# Altium PCB CAN-to-CAN.PcbDoc
Units mil, origin at the board's own origin, x right, y up, seen from the top; angles counter-clockwise.
Board outline 6000 x 4000 mil, 2 copper layers (Top Layer, Bottom Layer); 112 components, 87 nets, 444 pads, 10 vias.
Unrouted connection lines stored in the file: 229.
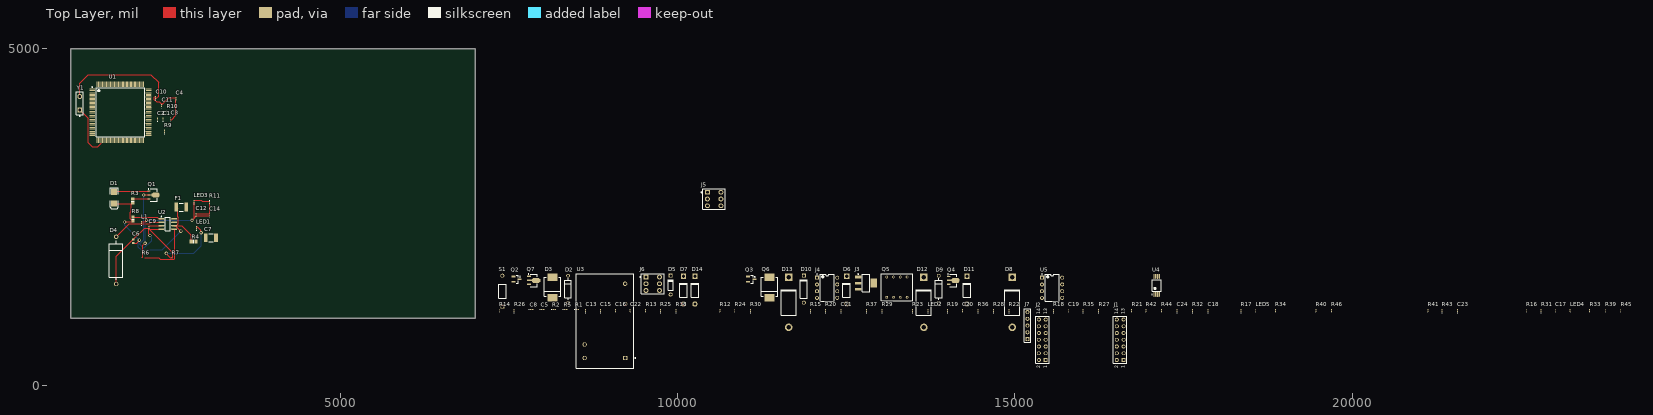
[diagram p0: Top Layer view]
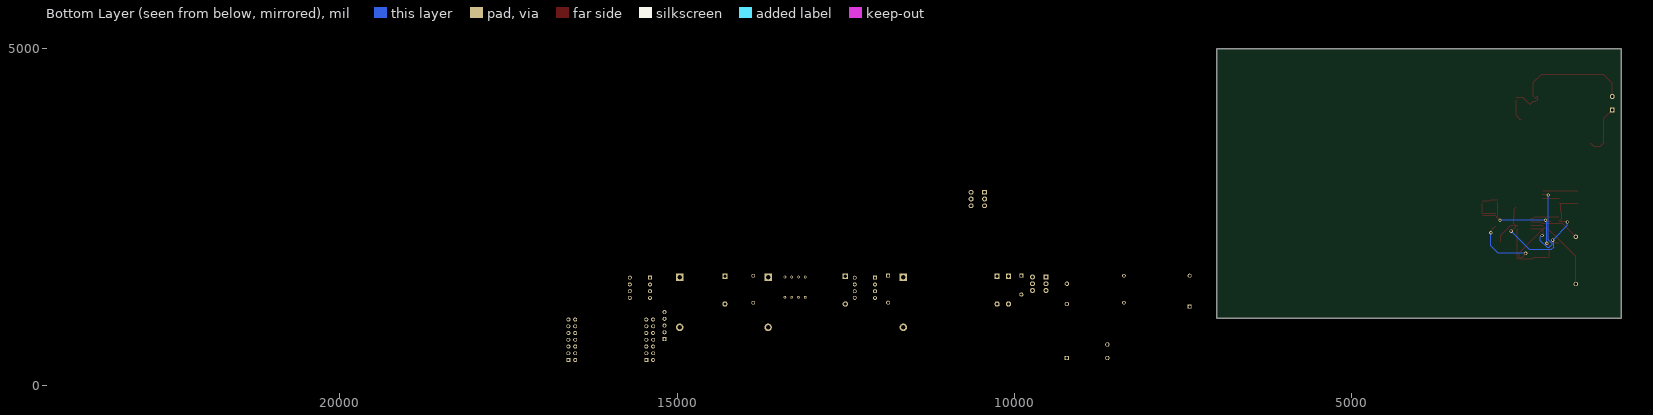
[diagram p1: Bottom Layer view, seen from below]

## Layer stack, top to bottom
Top Solder: solder mask 0.4, Solder Resist, Dk 3.5
Top Layer: signal copper 1.4
Dielectric 1: dielectric 12.6, FR-4, Dk 4.8
Bottom Layer: signal copper 1.4
Bottom Solder: solder mask 0.4, Solder Resist, Dk 3.5

## Board outline
1000,1000 7000,1000 7000,5000 1000,5000

## Design rules (kind name [scope] priority, off if disabled: settings)
Clearance [All] p1: gap=10 ignorepadtopadclearanceinfootprint=FALSE except(0: Arc-Hole Track-Hole SMDPad-Hole THPad-Hole Via-Hole Fill-Hole Poly-Hole Region-Hole Text-Hole)
PolygonConnect [All] p1: connectstyle=Relief reliefconductorwidth=10 reliefentries=4 polygonreliefangle="90 Angle" airgapwidth=10
RoomDefinition CAN-to-CAN [InComponentClass('CAN-to-CAN')] p1: confinementstyle=ConfineIn formatcopy=TRUE lockcomponents=FALSE outline 7335,248.78 24155,248.78 24155,1253.78 7335,1253.78
RoutingVias [All] p1: holewidth=28 width=50 viastyle="Through Hole" minholewidth=28 minwidth=50 maxholewidth=28 maxwidth=50
SolderMaskExpansion [All] p1: expansion=4
Width [All] p1: maxlimit=10 minlimit=10 preferedwidth=10
30 further rules are at their usual default settings.

## Components (designator, comment, footprint, x,y, rotation, side; value= is the part's Value field where it differs from the comment)
C1 "100n" 0603 2370,3955 r90 top
C2 "100n" 0603 2290,3955 r90 top
C3 "100n" 0603 2485,3960 r90 top
C4 "100n" 0603 2560,4256.22 r90 top
C5 "100n" 0603 8000,1133.78 r0 top
C6 "10u/16" 1608[0603] 1930,2145 r90 top value=470u/16
C7 "100n" 1812 3080,2195 r0 top
C8 "10n" 0603 7835,1133.78 r0 top value=100pF
C9 "100p" 0603 2160,2350 r90 top value=100pF
C10 "27p" 0603 2260,4273.78 r90 top value=100n
C11 "27p" 0603 2350,4155 r90 top value=100n
C12 "100u/6V3" 0402 2860,2535 r90 top value=470u/16
C13 "100n" 0603 8635,1118.78 r90 top
C14 "100n" 0603 3055,2535 r90 top
C15 "100n" 0603 8855,1118.78 r90 top
C16 "100n" 0603 9075,1118.78 r90 top
C17 "100n" 0603 23010,1118.78 r90 top
C18 "100n" 0603 17860,1118.78 r90 top
C19 "100n" 0603 15790,1118.78 r90 top
C20 "100n" 0603 14220,1118.78 r90 top
C21 "100n" 0603 12420,1118.78 r90 top
C22 "100n" 0603 9295,1118.78 r90 top
C23 "4n7" 0603 21560,1118.78 r90 top value=100n
C24 "4n7" 0603 17400,1118.78 r90 top value=100n
D1 "P6SMB15A" SMB 1645,2790 r270 top
D2 "LL4148" DIODE-0.4 8375,1433.78 r90 top
D3 "LL4448" DIODE_SMC 8145,1458.78 r90 top
D4 "LL5817" DIODE-0.7 1675,1860 r90 top
D5 "BAT54S" DO-35 9895,1493.78 r90 top
D6 "BAT54S" DO-41 12505,1418.78 r90 top
D7 "BAT54S" DO-204AL 10085,1418.78 r90 top
D8 "LL4148" DO-201AD 14960,1238.78 r90 top
D9 "LL4148" DIODE-0.4 13870,1433.78 r90 top
D10 "LL4148" DO-7 11870,1433.78 r90 top
D11 "BAT54S" DO-41 14290,1418.78 r90 top
D12 "BAT54S" DO-201AD 13650,1238.78 r90 top
D13 "BAT54S" DO-201AD 11645,1238.78 r90 top
D14 "BAT54S" DO-41 10255,1418.78 r90 top
F1 "Fuse 1" 1812 2640,2650 r180 top
J1 "Header 7X2" HDR2X7 16610,383.78 r90 top
J2 "Header 7X2" HDR2X7 15455,383.78 r90 top
J3 "MX-43045-0400" SOT223_N 12790,1523.78 r0 top
J4 "MX-43045-0800" DIP-8 12215,1453.78 r0 top
J5 "MX-43045-0600" DPDT-6 10540,2770.2 r0 top
J6 "MX-43045-0600" DPDT-6 9630,1513.78 r0 top
J7 "ZL201" HDR1X5 15185,693.78 r90 top
L1 "DL22-330" 0603 2050,2420 r90 top value=100uH
LED1 "HCL-1904AYL" 0603 2865,2345 r90 top
LED2 "HCL-1906BR1" 0603 13710,1118.78 r90 top
LED3 "HCL-1903BG4" 0603 2830,2735 r90 top
LED4 "HCL-1904AYL" 0603 23230,1118.78 r90 top
LED5 "HCL-1906BR1" 0603 18570,1118.78 r90 top
Q1 "BSS138" SOT89L 2230,2830 r0 top
Q2 "BSS123" SOT23_M 7610,1583.78 r0 top
Q3 "BSS123" SOT23_M 11090,1583.78 r0 top
Q4 "BSS123" SOT89L 14085,1563.78 r0 top
Q5 "BSS123" DIP-P8 13250,1463.78 r0 top
Q6 "BSS123" DIODE_SMC 11360,1458.78 r90 top
Q7 "BSS123" SOT89N 7865,1563.78 r0 top
R1 "4k7" 0603 8510,1133.78 r0 top value=1K
R2 "4k7" 0603 8170,1133.78 r0 top value=1K
R3 "1M" 6-0805_L 1920,2740 r90 top value=1K
R4 "4k7" 6-0805_N 2825,2140 r0 top value=1K
R5 "10k" 0603 8340,1133.78 r0 top value=1K
R6 "3k6 1%" 0603 2085,1900 r0 top value=1K
R7 "1k2 1%" 0603 2530,1900 r0 top value=1K
R8 "1R" 6-0805_L 1925,2471.5 r270 top value=1K
R9 "nc" 0603 2390,3775 r90 top value=1K
R10 "1k8" 0603 2425,4060 r90 top value=1K
R11 "1k8" 0603 3060,2720 r270 top value=1K
R12 "10k" 0603 10625,1118.78 r90 top value=1K
R13 "470" 0603 9525,1118.78 r90 top value=1K
R14 "4k7" 0603 7355,1118.78 r90 top value=1K
R15 "4k7" 0603 11970,1118.78 r90 top value=1K
R16 "4k7" 0603 22580,1118.78 r90 top value=1K
R17 "4k7" 0603 18350,1118.78 r90 top value=1K
R18 "4k7" 0603 15570,1118.78 r90 top value=1K
R19 "4k7" 0603 14000,1118.78 r90 top value=1K
R20 "4k7" 0603 12190,1118.78 r90 top value=1K
R21 "10k" 0603 16730,1118.78 r90 top value=1K
R22 "10k" 0603 14910,1118.78 r90 top value=1K
R23 "10k" 0603 13480,1118.78 r90 top value=1K
R24 "10k" 0603 10845,1118.78 r90 top value=1K
R25 "1k" 0603 9745,1118.78 r90 top value=1K
R26 "4k7" 0603 7575,1118.78 r90 top value=1K
R27 "10k" 0603 16240,1118.78 r90 top value=1K
R28 "10k" 0603 14680,1118.78 r90 top value=1K
R29 "10k" 0603 13030,1118.78 r90 top value=1K
R30 "10k" 0603 11080,1118.78 r90 top value=1K
R31 "1k" 0603 22800,1118.78 r90 top value=1K
R32 "1k" 0603 17630,1118.78 r90 top value=1K
R33 "nc" 0603 23520,1118.78 r90 top value=1K
R34 "nc" 0603 18860,1118.78 r90 top value=1K
R35 "1k" 0603 16010,1118.78 r90 top value=1K
R36 "1k" 0603 14450,1118.78 r90 top value=1K
R37 "1k" 0603 12800,1118.78 r90 top value=1K
R38 "1k" 0603 9975,1118.78 r90 top value=1K
R39 "CAN0001" 0603 23750,1118.78 r90 top
R40 "CAN0001" 0603 19460,1118.78 r90 top
R41 "68" 0603 21120,1118.78 r90 top value=1K
R42 "68" 0603 16940,1118.78 r90 top value=1K
R43 "68" 0603 21330,1118.78 r90 top value=1K
R44 "68" 0603 17170,1118.78 r90 top value=1K
R45 "CAN0001" 0603 23980,1118.78 r90 top
R46 "CAN0001" 0603 19690,1118.78 r90 top
S1 "DTSM32NB" PIN-W2/E2.8 7400,1403.78 r90 top
U1 "PIC30F5011" TQG144_M 1737.68,4056.1 r0 top
U2 "MC33063AD" SO8_N 2440,2400 r0 top
U3 "MCP1320-46LT" MODULE5B 8920,963.78 r90 top
U4 "MCP2551-I/SN" DB008_L 17100,1488.78 r90 top
U5 "MCP2551-I/SN" DIP-8 15550,1453.78 r0 top
Y1 "10MHz" SPST-2 1135,4190 r90 top

## Footprints (in the part's own frame and the unit in brackets; to place one, negate y for a bottom-side part, rotate by r counter-clockwise, add the part's x,y. Pads: shape width x height; smd on the part's side, far side on the other; paste and mask are expansions set on the pad)
6-0805_L [mm] "Chip Resistor, Body 2.0x1.2mm, IPC High Density"
  rect 1x1.3 smd: 1(-0.8,0) 2(0.8,0)
  silkscreen extent 0,-0.55 0,0.55, body extent -1.07,-0.7 1.07,0.7, height 0.7
6-0805_N [mm] "Chip Resistor, Body 2.0x1.2mm, IPC Medium Density"
  rect 1.2x1.4 smd: 1(-0.9,0) 2(0.9,0)
  silkscreen extent 0,-0.6 0,0.6, body extent -1.07,-0.7 1.07,0.7, height 0.7
0402 [mm] "Chip Capacitor, Body 1.0x0.5mm, IPC High Density"
  rect 0.6x0.5 smd: 1(-0.5,0) 2(0.5,0)
  body extent -0.55,-0.3 0.55,0.3, height 1.3
0603 [mm] "Chip Inductor, Body 0.6x0.3mm, IPC High Density"
  rect 0.5x0.3 smd: 1(-0.35,0) 2(0.35,0)
  silkscreen extent -0.9,-0.05 -0.9,0.05, body extent -0.33,-0.18 0.33,0.18, height 0.55
1608[0603] [mm] "Chip Capacitor, Body 1.6x0.8mm, IPC High Density"
  rect 0.8x0.9 smd: 1(-0.7,0) 2(0.7,0)
  body extent -0.87,-0.48 0.87,0.48, height 1.3
1812 [mm] "Chip Capacitor, Body 4.5x3.2mm, IPC High Density"
  rect 1.4x3.3 smd: 1(-1.9,0) 2(1.9,0)
  silkscreen extent -0.8,-1.55 0.8,1.55, body extent -2.4,-1.7 2.4,1.7, height 1.4
DB008_L [mm] "SOP, 8-Leads, Body 3x5.3mm, Pitch 0.65mm, IPC High Density"
  oval 1.8x0.45 smd: 1(-3.4,0.975) 2(-3.4,0.325) 3(-3.4,-0.325) 4(-3.4,-0.975) 5(3.4,-0.975) 6(3.4,-0.325) 7(3.4,0.325) 8(3.4,0.975)
  silkscreen extent -3.52,-1.65 2.1,1.87, body extent -2.8,-1.65 2.8,1.65, height 2
DIODE-0.4 [mm] "Diode, Thru-Hole; 2 Leads; 0.4 in Pin Spacing"
  round 1.4 hole 0.85: 1(-5.08,0) 2(5.08,0)
  silkscreen extent -4.06,-1.27 4.06,1.27
DIODE-0.7 [mm] "Diode, Thru-Hole; 2 Leads; 0.7 in Pin Spacing"
  round 1.65 hole 1: 1(-8.89,0) 2(8.89,0)
  silkscreen extent -7.37,-2.54 7.37,2.54
DIODE_SMC [mil] "Diode; 2 Leads"
  rect 110x150 smd: 1(-150,0) 2(150,0)
  silkscreen extent -130,-120 150,120
DIP-8 [mm] "DIP; 8 Leads; Row Spacing 7.62 mm; Pitch 2.54 mm"
  rect 1.5x1.5 hole 0.9: 1(-3.81,3.81)
  round 1.5 hole 0.9: 2(-3.81,1.27) 3(-3.81,-1.27) 4(-3.81,-3.81) 5(3.81,-3.81) 6(3.81,-1.27) 7(3.81,1.27) 8(3.81,3.81)
  silkscreen extent -3.93,-5.15 2.65,5.23, body extent -3.6,-5.15 3.6,5.15, height 5.08
DIP-P8 [mm] "Dual-Pole Dual-Throw Relay; 8 Leads"
  rect 1x1 hole 0.6: 1(-3.81,-3.81)
  round 1 hole 0.6: 2(-1.27,-3.81) 3(1.27,-3.81) 4(3.81,-3.81) 5(3.81,3.81) 6(1.27,3.81) 7(-1.27,3.81) 8(-3.81,3.81)
  silkscreen extent -5.9,-5.82 5.9,5.05
DO-7 [mm] "Diode, Axial; Body 7 x 2.7 mm (LxDia. max), Lead Dia. 0.53 mm (max)"
  round 1.5 hole 0.9: 1(-5.1,0)
  rect 1.5x1.5 hole 0.9: 2(5.1,0)
  silkscreen extent -3.5,-1.35 3.6,1.35
DO-35 [mm] "Diode, Axial; Body 3.8 x 1.9 mm (LxDia. max), Lead Dia. 0.53 mm (max)"
  round 1.5 hole 0.9: 1(-3.55,0)
  rect 1.5x1.5 hole 0.9: 2(3.55,0)
  silkscreen extent -1.95,-0.95 2.05,0.95
DO-41 [mm] "Diode, Axial; Body 5.2 x 2.7 mm (LxDia. max), Lead Dia. 0.86 mm (max)"
  round 2 hole 1.2: 1(-5.23,0)
  rect 2x2 hole 1.2: 2(5.23,0)
  silkscreen extent -2.65,-1.4 2.75,1.4
DO-201AD [mm] "Diode, Axial; Body 9.5 x 5.6 mm (LxDia. max), Lead Dia. 1.32 mm (max)"
  round 2.8 hole 1.7: 1(-9.42,0)
  rect 2.8x2.8 hole 1.7: 2(9.42,0)
  silkscreen extent -4.8,-2.8 4.9,2.8
DO-204AL [mm] "Diode, Axial; Body 5.2 x 2.7 mm (LxDia. max), Lead Dia. 0.86 mm (max)"
  round 2 hole 1.2: 1(-5.23,0)
  rect 2x2 hole 1.2: 2(5.23,0)
  silkscreen extent -2.65,-1.4 2.75,1.4
DPDT-6 [mm] "Switch; 6 Leads"
  rect 1.85x1.85 hole 1.1: 1(-2.54,2.54)
  round 1.85 hole 1.1: 2(-2.54,0) 3(-2.54,-2.54) 4(2.54,-2.54) 5(2.54,0) 6(2.54,2.54)
  silkscreen extent -4.96,-3.81 4.28,3.81
HDR1X5 [mm] "Connector; Header; 5 Position"
  rect 1.5x1.5 hole 0.9: 1(0,0)
  round 1.5 hole 0.9: 2(2.54,0) 3(5.08,0) 4(7.62,0) 5(10.16,0)
  silkscreen extent -1.27,-1.27 11.43,1.27
HDR2X7 [mm] "Connector; Header; 7x2 Position"
  rect 1.5x1.5 hole 0.9: 1(0,0)
  round 1.5 hole 0.9: 2(0,2.54) 3(2.54,0) 4(2.54,2.54) 5(5.08,0) 6(5.08,2.54) 7(7.62,0) 8(7.62,2.54) 9(10.16,0) 10(10.16,2.54) 11(12.7,0) 12(12.7,2.54) 13(15.24,0) 14(15.24,2.54)
  silkscreen extent -1.27,-1.27 16.51,3.81
MODULE5B [mm] "DIP; 5 Round Pins; Row Space 15.24 mm; Pitch 2.54 mm"
  rect 1.65x1.65 hole 1: 1(-13.97,-7.62)
  round 1.65 hole 1: 2(-13.97,7.62) 3(-8.89,7.62) 4(13.97,-7.62) 5(6.35,-7.62)
  silkscreen extent -17.8,-11.58 17.8,10.8, body extent -17.8,-10.8 17.8,10.8, height 14
PIN-W2/E2.8 [mm] "Thru-Hole; 2 Leads"
  rect 1.5x1.5 hole 0.9: 1(-5.825,0)
  round 1.5 hole 0.9: 2(5.825,0)
  silkscreen extent -2.65,-1.4 2.65,1.4
SMB [mm] "DO-214-AA/SMB; 2 C-Bend Leads; Body 5.3 x 3.6 mm, inc. leads (LxW)"
  rect 2.3x2.3 smd: 1(-2.25,0) 2(2.25,0)
  silkscreen extent -3.8,-1.55 4.1,1.55
SO8_N [mm] "SOIC, 8-Leads, Body 4.9x3.9mm, Pitch 1.27mm, IPC Medium Density"
  oval 2.2x0.6 smd: 1(-2.4,1.905) 2(-2.4,0.635) 3(-2.4,-0.635) 4(-2.4,-1.905) 5(2.4,-1.905) 6(2.4,-0.635) 7(2.4,0.635) 8(2.4,1.905)
  silkscreen extent -2.52,-2.5 0.9,2.88, body extent -2,-2.5 2,2.5, height 1.75
SOT23_M [mm] "SOT23, 3-Leads, Body 2.9x1.3mm, Pitch 0.95mm, Lead Span 2.3mm - Reverse Pinning, IPC Low Density"
  rect 1.45x0.6 smd: 1(1.175,0) 2(-1.175,-0.95) 3(-1.175,0.95)
  silkscreen extent -0.1,-1.5 1.48,1.5, body extent -0.7,-1.5 0.7,1.5, height 1.1
SOT89L [mm] "SOT89, 3-Leads, Body 4.5x2.4 mm, Pitch 1.5mm, Lead Span 4.1mm, IPC High Density"
  rect 1.2x0.5 smd: 1(-1.7,1.5) 3(-1.7,-1.5)
  rect 1.6x0.5 smd: 2(-1.5,0)
  oct 3x1.8 smd: 2(0.8,0)
  silkscreen extent -2.07,-2.3 1.3,2.42, body extent -1.3,-2.3 1.3,2.3, height 1.6
SOT89N [mm] "SOT89, 3-Leads, Body 4.5x2.4 mm, Pitch 1.5mm, Lead Span 4.1mm, IPC Medium Density"
  rect 1.4x0.6 smd: 1(-1.8,1.5) 3(-1.8,-1.5)
  rect 1.8x0.6 smd: 2(-1.6,0)
  oct 3.2x1.9 smd: 2(0.9,0)
  silkscreen extent -2.07,-2.3 1.3,2.47, body extent -1.3,-2.3 1.3,2.3, height 1.6
SOT223_N [mm] "SOT223, 4-Leads, Body 6.5x3.5mm, Pitch 2.3mm, Lead Span 7mm, IPC Medium Density"
  rect 2.4x1 smd: 1(-2.9,2.3) 2(-2.9,0) 3(-2.9,-2.3)
  rect 2.4x3.3 smd: 4(2.9,0)
  silkscreen extent -3.02,-3.35 1.4,3.47, body extent -1.85,-3.35 1.85,3.35, height 1.7
SPST-2 [mm] "Switch; 2 Leads"
  rect 1.85x1.85 hole 1.1: 1(-2.54,0)
  round 1.85 hole 1.1: 2(2.54,0)
  silkscreen extent -4.89,-1.27 4.28,1.27
TQG144_M [mm] "Thin QFP, 144-Leads, Body 20x20mm, Pitch 0.5mm, IPC Low Density"
  oval 2.1x0.3 smd: 1(-10.6,8.75) 2(-10.6,8.25) 3(-10.6,7.75) 4(-10.6,7.25) 5(-10.6,6.75) 6(-10.6,6.25) 7(-10.6,5.75) 8(-10.6,5.25) 9(-10.6,4.75) 10(-10.6,4.25) 11(-10.6,3.75) 12(-10.6,3.25) 13(-10.6,2.75) 14(-10.6,2.25) 15(-10.6,1.75) 16(-10.6,1.25) 17(-10.6,0.75) 18(-10.6,0.25) 19(-10.6,-0.25) 20(-10.6,-0.75) 21(-10.6,-1.25) 22(-10.6,-1.75) 23(-10.6,-2.25) 24(-10.6,-2.75) 25(-10.6,-3.25) 26(-10.6,-3.75) 27(-10.6,-4.25) 28(-10.6,-4.75) 29(-10.6,-5.25) 30(-10.6,-5.75) 31(-10.6,-6.25) 32(-10.6,-6.75) 33(-10.6,-7.25) 34(-10.6,-7.75) 35(-10.6,-8.25) 36(-10.6,-8.75) 73(10.6,-8.75) 74(10.6,-8.25) 75(10.6,-7.75) 76(10.6,-7.25) 77(10.6,-6.75) 78(10.6,-6.25) 79(10.6,-5.75) 80(10.6,-5.25) 81(10.6,-4.75) 82(10.6,-4.25) 83(10.6,-3.75) 84(10.6,-3.25) 85(10.6,-2.75) 86(10.6,-2.25) 87(10.6,-1.75) 88(10.6,-1.25) 89(10.6,-0.75) 90(10.6,-0.25) 91(10.6,0.25) 92(10.6,0.75) 93(10.6,1.25) 94(10.6,1.75) 95(10.6,2.25) 96(10.6,2.75) 97(10.6,3.25) 98(10.6,3.75) 99(10.6,4.25) 100(10.6,4.75) 101(10.6,5.25) 102(10.6,5.75) 103(10.6,6.25) 104(10.6,6.75) 105(10.6,7.25) 106(10.6,7.75) 107(10.6,8.25) 108(10.6,8.75)
  oval 0.3x2.1 smd: 37(-8.75,-10.6) 38(-8.25,-10.6) 39(-7.75,-10.6) 40(-7.25,-10.6) 41(-6.75,-10.6) 42(-6.25,-10.6) 43(-5.75,-10.6) 44(-5.25,-10.6) 45(-4.75,-10.6) 46(-4.25,-10.6) 47(-3.75,-10.6) 48(-3.25,-10.6) 49(-2.75,-10.6) 50(-2.25,-10.6) 51(-1.75,-10.6) 52(-1.25,-10.6) 53(-0.75,-10.6) 54(-0.25,-10.6) 55(0.25,-10.6) 56(0.75,-10.6) 57(1.25,-10.6) 58(1.75,-10.6) 59(2.25,-10.6) 60(2.75,-10.6) 61(3.25,-10.6) 62(3.75,-10.6) 63(4.25,-10.6) 64(4.75,-10.6) 65(5.25,-10.6) 66(5.75,-10.6) 67(6.25,-10.6) 68(6.75,-10.6) 69(7.25,-10.6) 70(7.75,-10.6) 71(8.25,-10.6) 72(8.75,-10.6) 109(8.75,10.6) 110(8.25,10.6) 111(7.75,10.6) 112(7.25,10.6) 113(6.75,10.6) 114(6.25,10.6) 115(5.75,10.6) 116(5.25,10.6) 117(4.75,10.6) 118(4.25,10.6) 119(3.75,10.6) 120(3.25,10.6) 121(2.75,10.6) 122(2.25,10.6) 123(1.75,10.6) 124(1.25,10.6) 125(0.75,10.6) 126(0.25,10.6) 127(-0.25,10.6) 128(-0.75,10.6) 129(-1.25,10.6) 130(-1.75,10.6) 131(-2.25,10.6) 132(-2.75,10.6) 133(-3.25,10.6) 134(-3.75,10.6) 135(-4.25,10.6) 136(-4.75,10.6) 137(-5.25,10.6) 138(-5.75,10.6) 139(-6.25,10.6) 140(-6.75,10.6) 141(-7.25,10.6) 142(-7.75,10.6) 143(-8.25,10.6) 144(-8.75,10.6)
  silkscreen extent -10.72,-9.15 9.15,9.57, body extent -10,-10 10,10, height 1.6

## Part data
C1 C2 C3 C4 C5 C7 C8 C9 C10 C11 C13 C14 C15 C16 C17 C18 C19 C20 C21 C22 C23 C24: library part Cap, "Capacitor", LatestRevisionDate=17-Jul-2002, LatestRevisionNote="Re-released for DXP Platform.", PackageReference=RAD-0.3, Published=8-Jun-2000, Publisher="Altium Limited"
C6 C12: library part "Cap Pol1", "Polarized Capacitor (Radial)", LatestRevisionDate=17-Jul-2002, LatestRevisionNote="Re-released for DXP Platform.", PackageReference=RB7.6-15, Published=8-Jun-2000, Publisher="Altium Limited"
D1: library part "D Zener", "Zener Diode", LatestRevisionDate=17-Jul-2002, LatestRevisionNote="Re-released for DXP Platform.", PackageReference=DIODE-0.7, Published=8-Jun-2000, Publisher="Altium Limited"
D2 D4 D8 D9 D10: library part 1N4148, "High Conductance Fast Diode", Code_JEDEC=DO-204-AH, ComponentLink1Description="Manufacturer Link", ComponentLink1URL=http://www.fairchildsemi.com/, ComponentLink2Description=Datasheet, ComponentLink2URL=http://www.fairchildsemi.com/ds/1N%2F1N4148.pdf, DatasheetDocument=1997, LatestRevisionDate=17-Jul-2002, LatestRevisionNote="Re-released for DXP Platform.", PackageReference=DO-35, Published=8-Jun-2000, Publisher="Altium Limited"
D3: library part Diode, "Default Diode", PackageDocument=Sep-1996, Code_JEDEC=DO-214-AB, LatestRevisionDate=17-Jul-2002, LatestRevisionNote="Re-released for DXP Platform.", PackageReference=SMC, Published=8-Jun-2000, Publisher="Altium Limited"
D5 D6 D7 D11 D12 D13 D14: "Schottky Barrier Double Diode", ComponentLink1Description="Manufacturer Link", ComponentLink1URL=http://www.semiconductors.philips.com/, ComponentLink2Description=Datasheet, ComponentLink2URL=http://www.semiconductors.philips.com/acrobat/datasheets/BAT54_SERIES_4.pdf, DatasheetVersion=4-Mar-2002, LatestRevisionDate=12-Dec-2006, LatestRevisionNote="IPC-7351 Footprint Added.", PackageDescription="3-Pin SOT-23 Package 0.95 mm Pitch, 2.3 mm Lead Span", PackageReference=SOT23, PackageVersion=May-1999, Published=17-Sep-2003, Publisher="Altium Limited"
F1: "Fuse", LatestRevisionDate=17-Jul-2002, LatestRevisionNote="Re-released for DXP Platform.", PackageReference=PIN-W2/E2.8, Published=8-Jun-2000, Publisher="Altium Limited"
J1 J2: "Header, 7-Pin, Dual row", LatestRevisionDate=17-Jul-2002, LatestRevisionNote="Re-released for DXP Platform.", Publisher="Altium Limited"
J3: library part "Header 2X2", "Header, 2-Pin, Dual row", LatestRevisionDate=17-Jul-2002, LatestRevisionNote="Re-released for DXP Platform.", Publisher="Altium Limited"
J4: library part "Header 4X2A", "Header, 4-Pin, Dual row", LatestRevisionDate=17-Jul-2002, LatestRevisionNote="Re-released for DXP Platform.", Publisher="Altium Limited"
J5 J6: library part "Header 6", "Header, 6-Pin", LatestRevisionDate=17-Jul-2002, LatestRevisionNote="Re-released for DXP Platform.", Publisher="Altium Limited"
J7: library part CON5, "Connector"
L1: library part "Inductor Iron", "Magnetic-Core Inductor", Published=24-Mar-1999, Publisher="Altium Limited", Revision="July-2002: Re-released for DXP Platform."
LED1 LED2 LED3 LED4 LED5: library part LED3, "Typical BLUE SiC LED", Published=8-Jun-2000, Publisher="Altium Limited", Revision 1="Jul-2002: Re-released for DXP Platform.", Revision 2="17-Dec-2003: PCB Footprint replaced."
Q1: "N-Channel Enhancement Mode Vertical DMOS FET", ComponentLink1Description="Manufacturer Link", ComponentLink1URL=http://www.zetex.com/, ComponentLink2Description=Datasheet, ComponentLink2URL=www.zetex.com/3.0/pdf/BSS138.pdf, DatasheetVersion=Mar-96, PackageDescription="SOT-23; 3 Leads; Body 3.1 x 2.5 mm, inc. leads (LxW max), Alternate Lead Configuration", PackageReference=SOT23, PackageVersion=1996, Published=17-Dec-2003, Publisher="Altium Limited"
Q2 Q3 Q4 Q5 Q6 Q7: "N-channel Enhancement Mode Vertical D-MOSFET", ComponentLink1Description="Manufacturer Link", ComponentLink1URL=http://www.semiconductors.philips.com/, ComponentLink2Description=Datasheet, ComponentLink2URL=http://www.semiconductors.philips.com/acrobat/datasheets/BSS123_3.pdf, DatasheetVersion=Apr-1995, LatestRevisionDate=12-Dec-2006, LatestRevisionNote="IPC-7351 Footprint Added.", PackageDescription="3-Pin SOT-23 Package 0.95 mm Pitch, 2.3 mm Lead Span", PackageReference=SOT23, PackageVersion=May-1999, Published=17-Sep-2003, Publisher="Altium Limited"
R1 R2 R3 R4 R5 R6 R7 R8 R9 R10 R11 R12 R13 R14 R15 R16 R17 R18 R19 R20 R21 R22 R23 R24 R25 R26 R27 R28 R29 R30 R31 R32 R33 R34 R35 R36 R37 R38 R41 R42 R43 R44: library part Res2, "Resistor", LatestRevisionDate=17-Jul-2002, LatestRevisionNote="Re-released for DXP Platform.", PackageReference=AXIAL-0.4, Published=8-Jun-2000, Publisher="Altium Limited"
R39 R40 R45 R46: library part "Res Varistor", "Varistor (Voltage-Sensitive Resistor)", LatestRevisionDate=04-Mar-2005, LatestRevisionNote="PCB Footprint replaced.", PackageReference=6-0805, Published=24-Mar-1999, Publisher="Altium Limited"
S1: library part PUSHB, "Switch PushButton"
U1: "PIC30F5011 - Up"
U2: "DC-to-DC Converter Control Circuit", Code_IPC=SOIC127P600-8, Code_JEDEC=MS-012-AA, ComponentLink1Description="Manufacturer Link", ComponentLink1URL=http://www.onsemi.com/site/products/taxonomy/0,4438,503,00.html, ComponentLink2Description=Datasheet, ComponentLink2URL=http://www.onsemi.com/pub/Collateral/MC34063A-D.PDF, DatasheetVersion=1988, LatestRevisionDate=13-Apr-2006, LatestRevisionNote="IPC-7351 Footprint Added.", PackageDescription="8-Pin Small Outline Integrated Circuit 1.27 mm Pitch", PackageReference=751-02, Published=17-Jul-2002, Publisher="Altium Limited"
U3: library part MCP1320
U4 U5: "High Speed CAN Transceiver, 8-Pin Plastic SOIC, Industrial Grade", Code_JEDEC=MS-012, ComponentLink1Description="Manufacturer Link", ComponentLink1URL=http://www.microchip.com, ComponentLink2Description=Datasheet, ComponentLink2URL=http://ww1.microchip.com/downloads/en/DeviceDoc/21667d.pdf, DatasheetVersion=Nov-2003, LatestRevisionDate=13-Apr-2006, LatestRevisionNote="IPC-7351 Footprint Added.", PackageDescription="8-Pin Plastic Narrow Body Small Outline Integrated Circuit 1.27 mm Pitch", PackageReference=SOIC150-8, PackageVersion=Oct-2005, Published=6-Oct-2005, Publisher="Altium Limited"
Y1: library part XTAL, "Crystal Oscillator", LatestRevisionDate=17-Jul-2002, LatestRevisionNote="Re-released for DXP Platform.", PackageReference=R38, Published=8-Jun-2000, Publisher="Altium Limited"

## Via types
v1: diameter 50, hole 28, Top Layer to Bottom Layer, 10 vias

## Nets (pads, with @x,y where several pads share a name; then routed paths per layer and width w, separated by ;. In a path a pad name is that pad's centre, name@x,y a point inside that pad or via, vN(x,y) a via of type N, cw(c..) or ccw(c..) an arc to the next point about the centre after c; other vN are vias at no path point)
+5V: C1.1 C2.1 C3.1 C4.1 C12.1 C13.1 C14.1 C17.1 C18.1 D2.2 D3.2 D5.2 D6.2 D7.2 D11.2 D12.2 D13.2 D14.2 J1.2 J2.2 J2.4 J2.6 J3.2 J7.2 L1.2 LED2.1 LED3.1 LED4.1 LED5.1 R1.1 R5.2 R6.1 R12.1 R24.1 R27.1 R28.1 R29.1 R30.1 U1.10 U1.19 U1.26 U1.38 U1.57 U3.5 U4.3 U5.3 | length 2187.9
  Top Layer w10: L1.2 2103.78,2433.78 v1(2125,2455) ; R6.1 2071.22,2081.22 v1(2105,2115) ; C3.1 2485,3948.03 2485.91,3948.94 2497.12,3948.94 2560,4011.82 C4.1 ; v1@2801.65,2455 2801.65,2456.65 2830,2485 ; LED3.1 2830,2485 ; C14.1 2866.22,2521.22 2830,2485
  Bottom Layer w10: v1(2105,2115) 2105,2424.18 2125,2444.18 v1(2125,2455) v1(2800,2455)
+12V: C6.1 C7.1 D1.2 F1.2 J4.5 R3.1 R4.1 R8.2 U2.6 | length 2848.8
  Top Layer w10: D1.2 R3.1@1907.01,2701.42 ; v1(1800,2430) 1915,2430 R8.2 1919.09,2440 1884.41,2474.69 1884.41,2576.75 1899.41,2591.75 1899.41,2693.82 R3.1@1907.01,2701.42 ; R3.1@1914.09,2708.5 R3.1@1907.01,2701.42 ; C6.1 1977.44,2117.44 v1(2020,2160) ; U2.6 U2.6@2562.3,2375 ; F1.2 2587.76,2627.44 2587.76,2504.49 2592.8,2499.45 2592.8,2401.81 U2.6@2565.98,2375 ; v1(2635,2295) 2634.51,2295 2568.59,2360.92 2568.59,2368.71 U2.6@2562.3,2375 ; R4.1 2789.57,2230.43 2645,2375 U2.6@2565.98,2375 ; U2.6@2562.3,2375 U2.6@2565.98,2375
  Bottom Layer w10: v1(1800,2430) 1800,2380 v1(2020,2160) 2012.35,2152.35 2012.35,2124.06 2004.14,2115.86 2004.14,2055.86 2045,2015 2355,2015 v1(2635,2295)
+12VPWR: F1.1 J5.3 J6.3
ADC0: J1.4 U1.16
ADC1: J1.6 U1.15
ADC2: J1.8 U1.14
ADC3: J1.10 U1.13
ADC4: J1.12 U1.12
ButD: C19.1 R27.2 R35.2 U1.23
ButD_IN: J4.2 R35.1
ButN: C20.1 R28.2 R36.2 U1.22
ButN_IN: J4.3 R36.1
ButR: C21.1 R29.2 R37.2 U1.21
ButR_IN: J4.4 R37.1
CAN_BMS_RX: U1.58 U5.4
CAN_BMS_TX: R17.2 U1.59 U5.1
CAN_BMSS_H: J6.1 R44.1 R46.2 U5.7
CAN_BMSS_L: J6.2 R40.1 R42.1 U5.6
CAN_MUX_RX: U1.61 U4.4
CAN_MUX_TX: R16.2 U1.60 U4.1
CAN_MUXED_H: J5.1 R43.1 R45.2 U4.7
CAN_MUXED_L: J5.2 R39.1 R41.1 U4.6
ChrgLED: Q2.3 R14.1 U1.29
ChrgLED_OUT: J6.6 Q2.1
FluidHeater: Q7.3 R26.1 U1.30
FluidHeater_OUT: J5.6 Q7.1
GND: C1.2 C2.2 C3.2 C4.2 C5.1 C6.2 C7.2 C8.1 C9.1 C10.2 C11.2 C12.2 C13.2 C14.2 C15.2 C16.2 C17.2 C18.2 C19.2 C20.2 C21.2 C22.2 C23.1 C24.1 D4.1 D5.1 D6.1 D7.1 D11.1 D12.1 D13.1 D14.1 J1.14 J2.12 J2.14 J3.1 J4.1 J7.3 LED1.2 Q1.2 Q2.2 Q3.2 Q4.2 Q5.2 Q6.2 Q7.2 R7.1 R11.2 R14.2 R15.2 R18.2 R19.2 R20.2 R26.2 R31.2 R32.2 R39.2 R40.2 R45.1 R46.1 S1.1 U1.9 U1.20 U1.25 U1.41 U1.56 U2.4 U3.2 U4.2 U5.2 | length 4913.4
  Top Layer w10: D4.1 1675,1919.53 1928.03,2172.56 C6.2 1931.97,2172.56 2095.63,2336.22 C9.1 C9.1@2160,2332.28 ; v1(2085,2830) Q1.2@2170.94,2830 ; v1(2175,2230) 2175,2240.82 2160,2255.82 C9.1@2160,2332.28 ; C10.2 2260,4285.75 2259.09,4284.84 2247.88,4284.84 2239.09,4276.06 2239.09,4243.94 2274.26,4208.78 2313.93,4208.78 C11.2@2350,4172.72 ; U2.4 2167.28,2325 ; C11.2 C11.2@2350,4172.72 ; v1(2419.14,1964.14) 2419.14,1955.86 2475,1900 R7.1 2516.22,1976.06 2167.28,2325 ; C4.2 2451.22,4270 2354.84,4173.62 2350.91,4173.62 C11.2@2350,4172.72 ; C12.2 2862.95,2551.73 3054.09,2551.73 C14.2@3055,2550.83 ; LED1.2 2865,2356.97 2865.91,2356.06 2877.12,2356.06 2927.35,2305.84 2927.35,2277.65 v1(2935,2270) ; C14.2 C14.2@3055,2550.83 ; R11.2 3060,2557.72 3055,2552.72 C14.2@3055,2550.83 ; C9.1@2160,2332.28 2167.28,2325
  Bottom Layer w10: v1(2085,2830) 2085,2168.43 2024.14,2107.57 2024.14,2099.29 2079.29,2044.14 2090.71,2044.14 2200,2153.43 2200,2210 v1@2190,2220 ; v1(2419.14,1964.14) 2824.14,1964.14 2935,2075 v1(2935,2270)
GPIOC13: J2.3 U1.47
GPIOC14: J2.1 U1.48
GPIOD0: J2.5 U1.46
GPIOD1: J1.13 U1.49
GPIOD2: J1.11 U1.50
GPIOD3: J1.9 U1.51
GPIOD4: J1.7 U1.52
GPIOD5: J1.5 U1.53
GPIOD6: J1.3 U1.54
GPIOD7: J1.1 U1.55
GPIOD8: J2.13 U1.42
GPIOD9: J2.11 U1.43
GPIOD10: J2.9 U1.44
GPIOD11: J2.7 U1.45
GROUND: D1.1 J5.4 J6.4 Q1.1 | length 528.8
  Top Layer w10: D1.1@1645,2885 D1.1 1655.47,2889.06 Q1.1
ILUM: J3.4 Q3.3 R15.1
IMP: C15.1 R12.2 R13.2 U1.11
IMP_IN: J3.3 R13.1
IsFHerror: C22.1 R30.2 R38.2 U1.32
IsFHerror_IN: J5.5 R38.1
IsHeating: C16.1 R24.2 R25.2 U1.31
IsHeating_IN: J6.5 R25.1
LightD: Q4.3 R18.1 U1.24
LightD_OUT: D8.1 J4.6 Q4.1
LightN: Q5.3 R19.1 U1.27
LightN_OUT: D9.1 J4.7 Q5.1
LightR: R20.1 U1.28
LightR_OUT: D10.1 J4.8 Q6.1
MCLR: J7.1 R2.1 U1.7
NetC8_2: C8.2 D3.1 R5.1 S1.2 U3.3
NetC9_2: C9.2 U2.3 | length 192.5
  Top Layer w10: C9.2 2160,2367.72 2167.28,2375 U2.3
NetC10_1: C10.1 U1.39 Y1.2 | length 1731.7
  Top Layer w10: Y1.2 1135,4485 1265,4615 2190,4615 2305,4500 2305,4295.6 2272.12,4262.72 2260.91,4262.72 2260,4261.81 C10.1
NetC11_1: C11.1 U1.40 Y1.1 | length 776.8
  Top Layer w10: Y1.1 1258.21,3966.79 1258.21,3606.79 1320,3545 1403.78,3545 1452.24,3593.47 1452.24,3596.31
NetC23_2: C23.2 R33.2 R41.2 R43.2
NetC24_2: C24.2 R34.2 R42.2 R44.2
NetD4_2: D4.2 L1.1 U2.2 | length 764.7
  Top Layer w10: D4.2 1870.31,2405.31 2049.09,2405.31 L1.1 2102.35,2406.22 2108.57,2400 2164.85,2400 2189.85,2425 U2.2
NetD8_2: D8.2 R21.2
NetD9_2: D9.2 R22.2
NetD10_2: D10.2 R23.2
NetLED1_1: LED1.1 R4.2
NetLED2_2: LED2.2 R10.1
NetLED3_2: LED3.2 R11.1 | length 236.2
  Top Layer w10: LED3.2 2938.56,2748.78 2953.56,2733.78 R11.1
NetLED4_2: LED4.2 R16.1
NetLED5_2: LED5.2 R17.1
NetQ1_3: Q1.3 R3.2 | length 243.3
  Top Layer w10: R3.2 1920.55,2770.94 Q1.3
NetQ3_1: Q3.1 R21.1 R22.1 R23.1
NetR6_2: R6.2 R7.2 U2.5 | length 899.5
  Top Layer w10: R6.2 2307.04,1900 2327.95,1879.09 2532.28,1879.09 2541.06,1887.88 2541.06,1899.09 2541.97,1900 R7.2 2543.78,2318.71 2537.49,2325 U2.5
NetR8_1: R8.1 U2.1 U2.7 U2.8 | length 432.1
  Top Layer w10: R8.1 2286.02,2502.99 2314.02,2475 U2.1
NetR9_2: R9.2 U1.8
NetR10_2: R10.2 U1.37
NetR31_1: R31.1 U4.8
NetR32_1: R32.1 U5.8
NetR33_1: R33.1 U4.5
NetR34_1: R34.1 U5.5
PGC: J7.5 U1.17
PGD: J7.4 U1.18
RESET: C5.2 D2.1 R1.2 R2.2 U3.1
RX: J2.10 U1.34
TX: J2.8 U1.33
WDI: R9.1 U3.4
pads on no net: Q5.4 Q5.5 Q5.6 Q5.7 Q5.8 U1.1 U1.2 U1.3 U1.4 U1.5 U1.6 U1.35 U1.36 U1.62 U1.63 U1.64 U1.65 U1.66 U1.67 U1.68 U1.69 U1.70 U1.71 U1.72 U1.73 U1.74 U1.75 U1.76 U1.77 U1.78 U1.79 U1.80 U1.81 U1.82 U1.83 U1.84 U1.85 U1.86 U1.87 U1.88 U1.89 U1.90 U1.91 U1.92 U1.93 U1.94 U1.95 U1.96 U1.97 U1.98 U1.99 U1.100 U1.101 U1.102 U1.103 U1.104 U1.105 U1.106 U1.107 U1.108 U1.109 U1.110 U1.111 U1.112 U1.113 U1.114 U1.115 U1.116 U1.117 U1.118 U1.119 U1.120 U1.121 U1.122 U1.123 U1.124 U1.125 U1.126 U1.127 U1.128 U1.129 U1.130 U1.131 U1.132 U1.133 U1.134 U1.135 U1.136 U1.137 U1.138 U1.139 U1.140 U1.141 U1.142 U1.143 U1.144

## Text inside footprints (layer, text, board x,y; h text height)
J1: Top Overlay "2" at 16530,263.78 h50 r90; Top Overlay "1" at 16630,263.78 h50 r90; Top Overlay "14" at 16530,1063.78 h50 r90; Top Overlay "13" at 16630,1063.78 h50 r90
J2: Top Overlay "2" at 15375,263.78 h50 r90; Top Overlay "1" at 15475,263.78 h50 r90; Top Overlay "14" at 15375,1063.78 h50 r90; Top Overlay "13" at 15475,1063.78 h50 r90